# Altium PCB STM32 24V Industrial IO Bridge.PcbDoc (part 2 of 3)
Units mil, origin at the board's own origin, x right, y up, seen from the top; angles counter-clockwise.
Board outline 3937.01 x 3149.61 mil, 2 copper layers (Top Layer, Bottom Layer); 143 components, 89 nets, 439 pads, 318 vias.
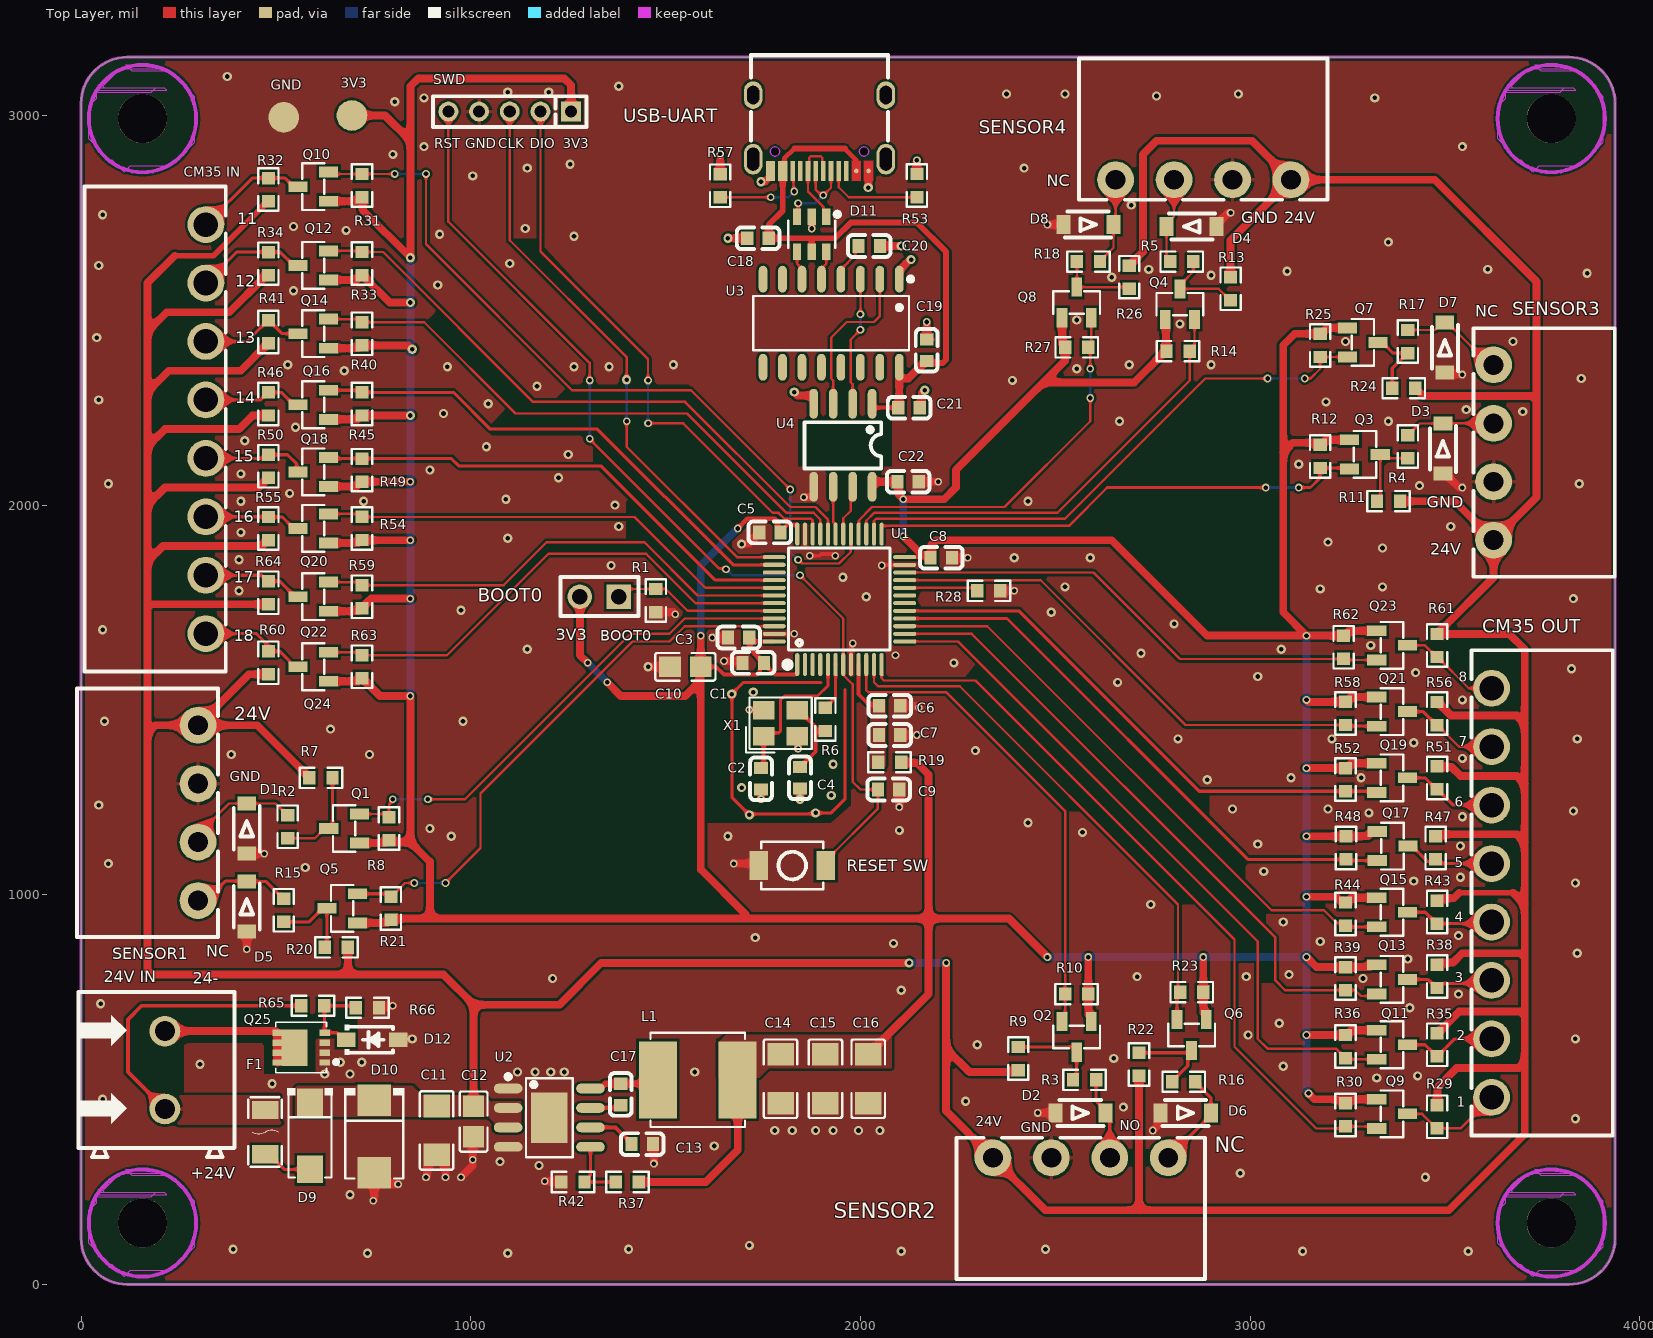
[diagram p0: Top Layer view]

## Via types
v1: diameter 23.62, hole 11.81, Top Layer to Bottom Layer, 228 vias
v2: diameter 19.68, hole 11.81, Top Layer to Bottom Layer, 90 vias

## Nets (pads, with @x,y where several pads share a name; then routed paths per layer and width w, separated by ;. In a path a pad name is that pad's centre, name@x,y a point inside that pad or via, vN(x,y) a via of type N, cw(c..) or ccw(c..) an arc to the next point about the centre after c; other vN are vias at no path point) (continued)
3V3: (continued)
  Top Layer w20: Q24.1@635.05,1547.6 R63.2@711.81,1547.6 ; Q22.1@635.05,1727.6 712.14,1727.6 744.55,1760 v2(845,1760) ; Q20.1@635.05,1902.6 R54.2@711.81,1902.6 ; Q18.1@635.05,2047.6 707.14,2047.6 719.55,2060 R49.2@720.68,2060 v2(845,2060) ; Q16.1@635.05,2220 R45.2@709.55,2220 ; Q14.1@635.05,2402.6 712.14,2402.6 719.55,2410 R40.2@720.68,2410 839.02,2410 849.02,2400 v1(850,2400) ; Q12.1@635.05,2577.6 706.81,2577.6 719.55,2590.34 R33.2@720.68,2590.34 721.81,2590.34 792.15,2520 v1(845,2520) ; Q10.1@635.05,2780 709.2,2780 719.55,2790.34 R31.2@720.68,2790.34 722.82,2788.19 722.82,2757.18 v1@844.31,2635.69 ; pad.4@695,3000 780,3000 845,2935 ; Q5.1@709.37,927.6 786.13,927.6 797.33,938.8 895,938.8 ; Q1.1@714.37,1132.6 R8.1@781.47,1132.6 ; R63.2@720.68,1555.34 721.81,1555.34 767.15,1510 v2(845,1510) 845,1135 ; R54.2@720.68,1910.34 721.02,1910 v2(845,1910) ; R45.2@720.68,2230 v1(845,2230) ; R8.1@790,1140 795,1135 845,1135 ; v1(845,2635) 845,2935 ; SWD.1@1257.48,3010 1257.48,3077.52 1240,3095 865,3095 845,3075 845,2935 ; BOOT0.2@1280,1765 1280,1615 v2(1300,1595) ; v2(1350,1545) 1385,1510 1550,1510 1590,1550 ; R37.2@1431.52,262.79 1602.79,262.79 1684.96,344.96 L1.2@1684.96,525 ; v2(1590,1665) C10.1@1590,1585 1590,1550 ; C3.2@1715,1660 C3.2@1716.09,1658.91 ; C16.2@2020,590.4 2024.78,590.4 2044.02,609.63 2044.02,614.42 2175,745.4 2175,938.8 ; U4.8@2030,2047 2030,2058.9 2031.1,2060 C22.2@2094.88,2060 2098.28,2056.6 2098.28,2026.72 v2(2110,2015) 2215,2015 2245,2045 2245,2090 2470,2315 ; R19.1@2104.66,1338.87 2144.42,1338.87 2175,1308.28 2175,938.8 ; v2(2110,1920) 2157.28,1872.72 2174.25,1872.72 2180,1866.97 C8.2@2180,1865 ; C8.2@2182.61,1867.61 2182.61,1898.28 2194.32,1910 2645,1910 2890,1665 v2(3145,1665) ; v2(2480,840) 2381.2,938.8 2175,938.8 ; Q8.1@2517.6,2480.63 2517.6,2414.21 2525.68,2406.13 R27.1@2525.68,2405 2525.19,2404.51 2525.19,2370.19 2470,2315 ; v2(2585,840) 2584.66,839.66 R10.1@2584.66,745 2584.66,692.94 2592.4,685.2 Q2.1@2592.4,674.37 ; Q4.1@2782.6,2476.26 2784.14,2474.72 2784.14,2392.33 2779.8,2387.99 2775.59,2387.99 2702.6,2315 2470,2315 ; v2(2880,840) R23.1@2880,750 2880,697.6 2887.4,690.2 Q6.1@2887.4,679.37 ; v2(3145,640) R36.2@3245,640 3246.13,640 3258.53,652.4 Q11.1@3325,652.4 ; v2(3145,840.12) 3170.8,814.32 R39.2@3245,814.32 3308.49,814.32 3314.17,820 Q13.1@3325,820 ; v2(3145,995) 3221.28,995 3230.4,985.88 3239.12,985.88 R44.2@3245,980 3246.13,980 3258.53,992.4 Q15.1@3325,992.4 ; v2(3145,1150) R48.2@3246.26,1150 3303.03,1150 3315.43,1162.4 Q17.1@3326.26,1162.4 ; v2(3145,1325) R52.2@3245,1325 3246.13,1325 3258.53,1337.4 Q19.1@3325,1337.4 ; v2(3145,1500) 3150,1495 R58.2@3245,1495 3246.13,1495 3258.53,1507.4 Q21.1@3325,1507.4 ; v2(3150,490) 3165,475 Q9.1@3325,475 ; Q7.1@3250,2454.8 3196.61,2454.8 3181.13,2439.32 R25.1@3180,2439.32 3179.32,2440 3115,2440 3085,2410 3085,2135 ; Q3.1@3255.63,2167.4 3193.87,2167.4 3181.13,2154.66 R12.1@3180,2154.66 3174.66,2160 3110,2160 3085,2135 ; Q23.1@3325,1677.4 3253.53,1677.4 3241.13,1665 R62.2@3240,1665 v2(3145,1665) ; 845,1135 895,1085 895,938.8 ; 895,938.8 1693.8,938.8 ; 1590,1550 1590,1065 1705,950 1693.8,938.8 ; 1693.8,938.8 2175,938.8 ; 3085,2135 3085,1725 v2(3145,1665)
  Bottom Layer w20: v2(845,1510) v2(845,1760) v2(845,1910) v2(845,2060) v1(845,2230) v1(845,2520) v1(845,2635) ; v2(1300,1595) v2(1350,1545) ; v2(1590,1665) 1590,1845 v2(1685,1940) ; v2(2110,1920) v2(2110,2015) ; v2(2480,840) v2(2585,840) v2(2880,840) 3123.32,840 3123.45,840.12 v2(3145,840.12) v2(3145,995) v2(3145,1150) v2(3145,1325) v2(3145,1500) v2(3145,1665) ; v2@3145,835.92 v2(3145,640) 3145,495 v2(3150,490)
24V_IN_RAW: "24V IN.1" F1.1 R65.2 | length 728.8
  Top Layer w10: 215,450 120,545 120,680 155,715 R65.2@565,715